# Altium PCB PiMX8MP_r0.3.PcbDoc (part 5 of 10)
Units mm, origin at the board's own origin, x right, y up, seen from the top; angles counter-clockwise.
Board outline 55 x 40 mm, 10 copper layers (Top Layer, Layer 1, Layer 2, Layer 3, Layer 4, Layer 5, Layer 6, Layer 7, Layer 8, Bottom Layer), stack 1.472 mm thick; 545 components, 477 nets, 2606 pads, 2278 vias.
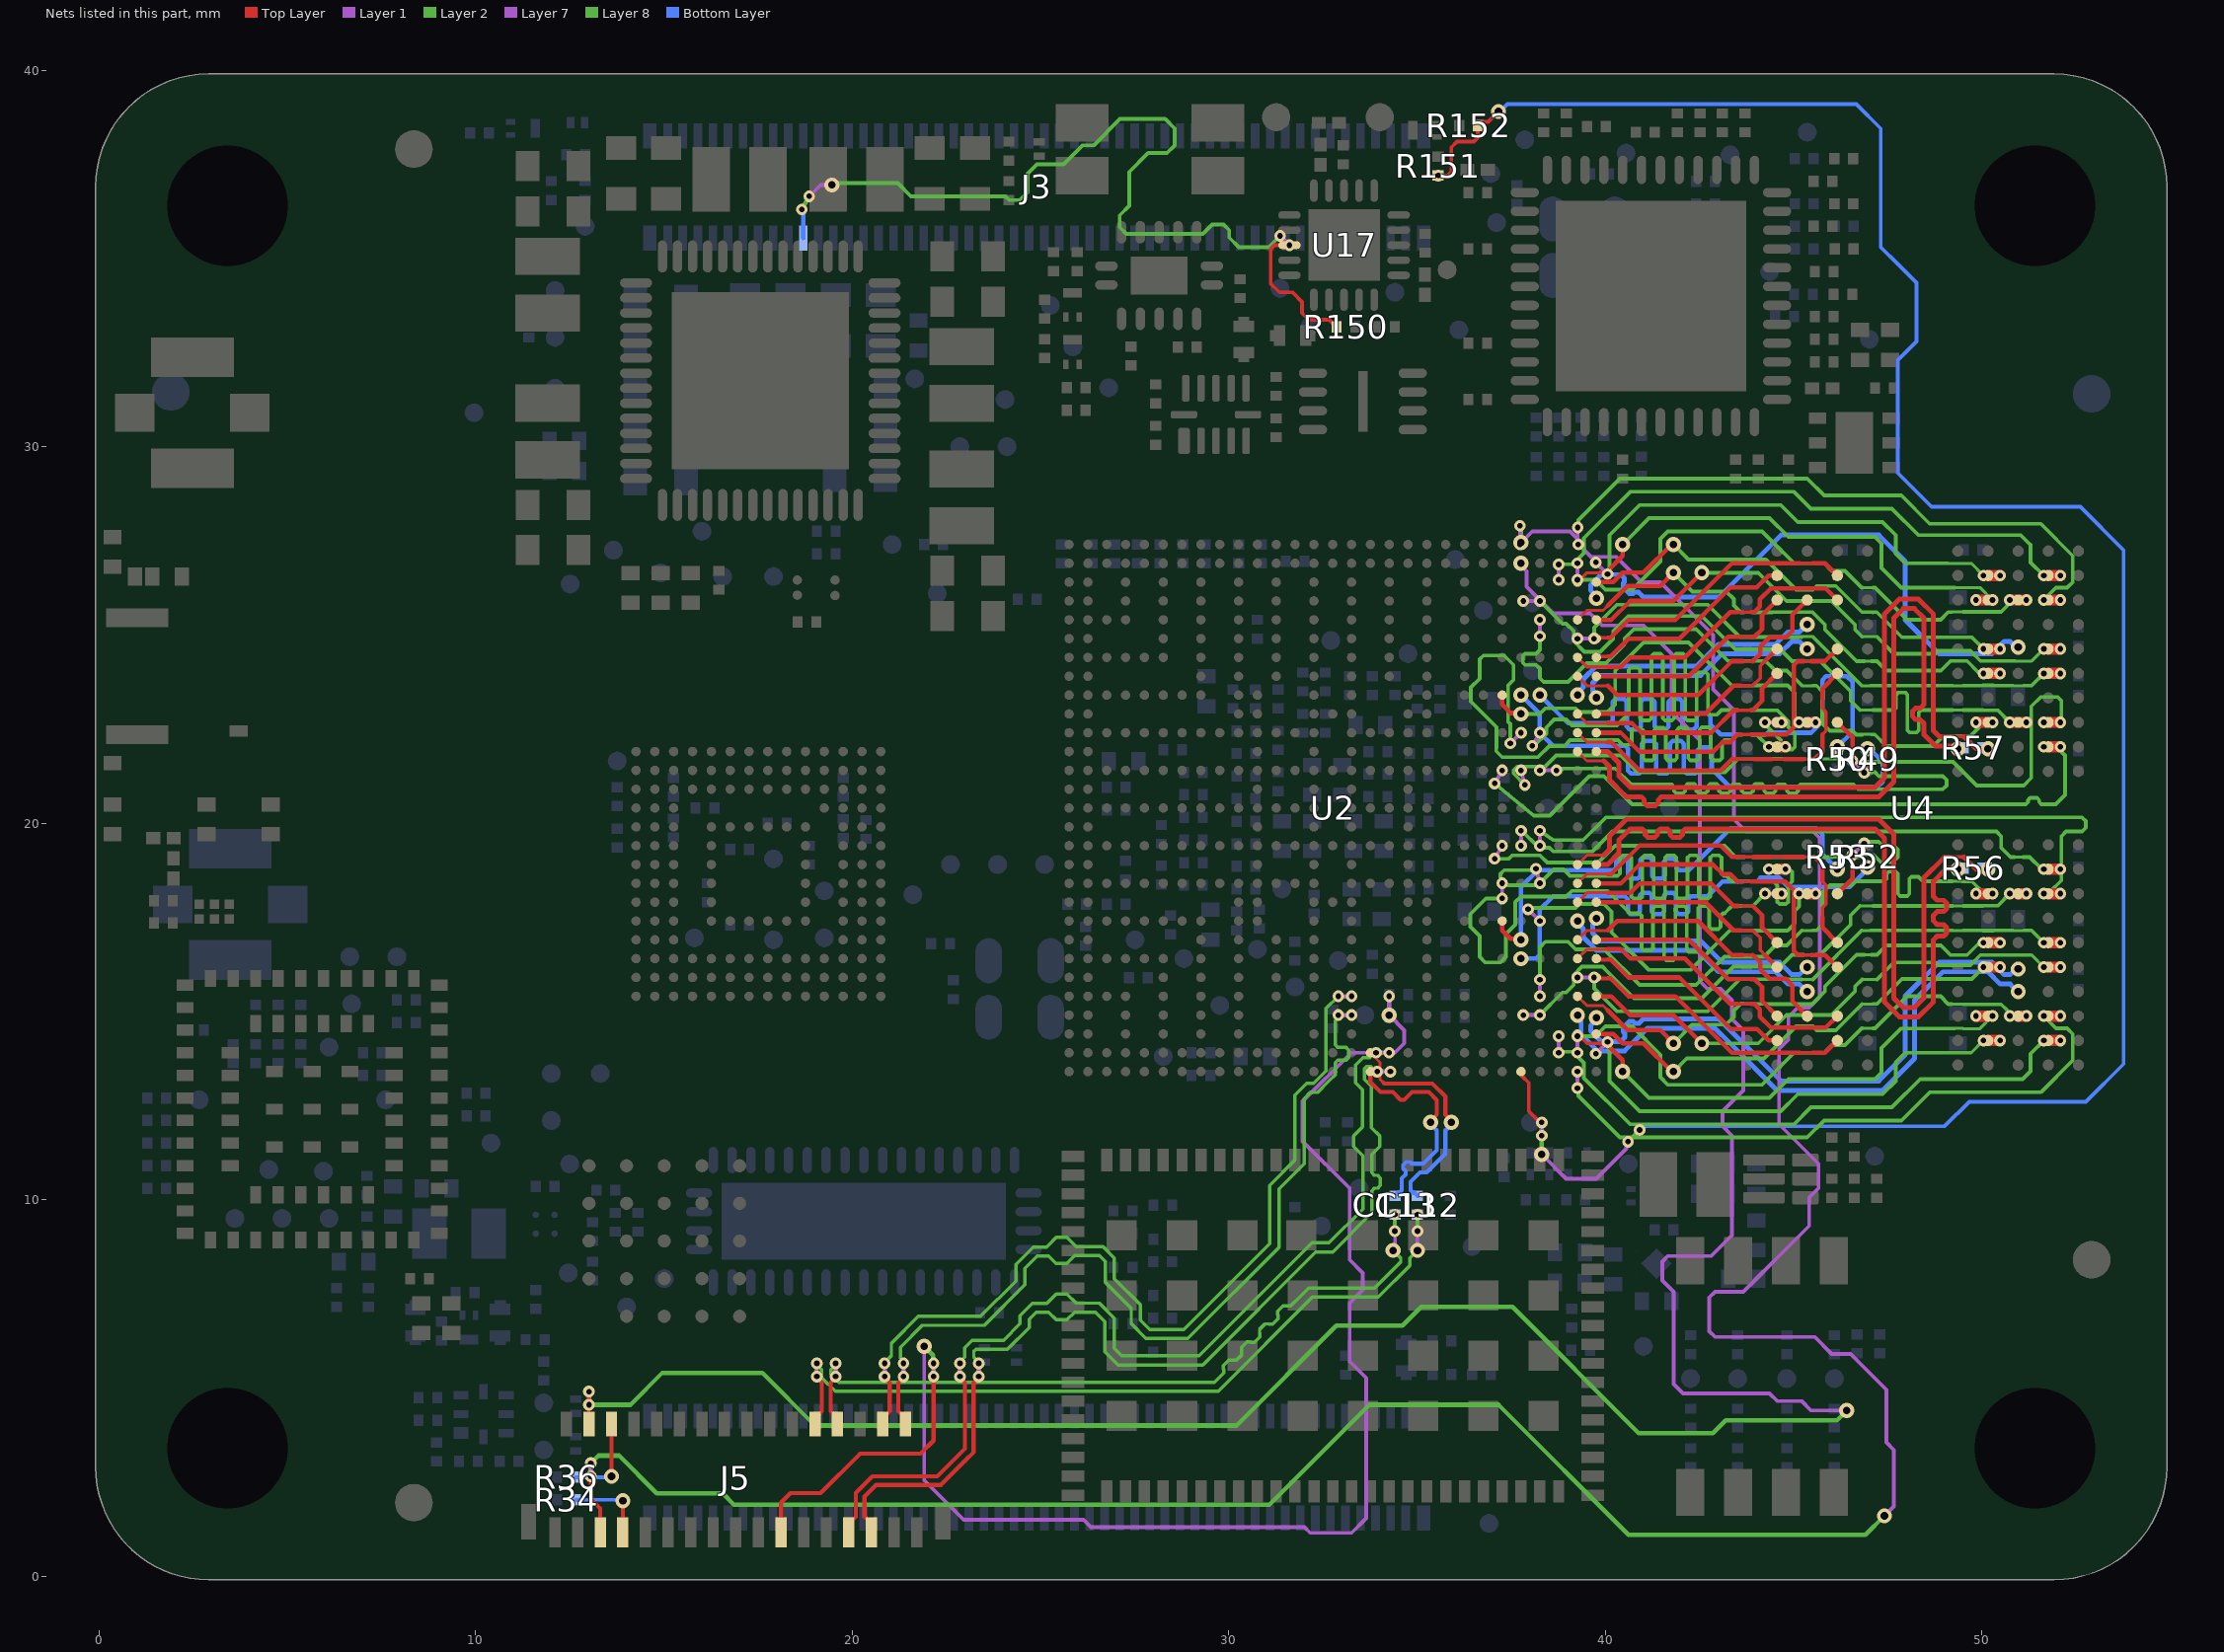
[diagram p13: the nets of this part, all layers, seen from the top]

## Via types
v1: diameter 0.4, hole 0.2, Top Layer to Bottom Layer, tented both sides, 946 vias
v2: diameter 0.31, hole 0.15, Top Layer to Layer 1, tented both sides, 321 vias
v3: diameter 0.31, hole 0.15, Layer 8 to Bottom Layer, tented both sides, 315 vias
v4: diameter 0.31, hole 0.15, Layer 1 to Layer 2, tented both sides, 257 vias
v5: diameter 0.31, hole 0.15, Layer 7 to Layer 8, tented both sides, 198 vias
v6: diameter 0.4, hole 0.2, Layer 2 to Layer 7, tented both sides, 169 vias
v7: diameter 0.31, hole 0.15, Top Layer to Layer 1, tented top, 72 vias

## Nets (pads, with @x,y where several pads share a name; then routed paths per layer and width w, separated by ;. In a path a pad name is that pad's centre, name@x,y a point inside that pad or via, vN(x,y) a via of type N, cw(c..) or ccw(c..) an arc to the next point about the centre after c; other vN are vias at no path point) (continued)
CON_SDA0: J3.82 R150.1 U17.3 | length 25.2
  Top Layer w0.1: v2(31.612,35.354) 31.212,35.354 31.112,35.254 31.112,34.338 31.35,34.1 31.7,34.1 31.95,33.85 31.95,33.55 32.125,33.375 32.667,33.375 32.762,33.279 32.777,33.279 32.862,33.194 R150.1@32.862,33.179
  Layer 1 w0.12: v4(31.365,35.602) v2(31.612,35.354)
  Layer 2 w0.1: v6(19.462,36.954) 19.512,37.004 21.212,37.004 21.562,36.654 24.067,36.654 24.167,36.554 24.457,36.554 24.662,36.759 24.662,37.254 24.912,37.504 25.612,37.504 26.112,38.004 26.412,38.004 27.112,38.704 28.312,38.704 28.562,38.454 28.562,38.004 28.362,37.804 27.862,37.804 27.357,37.299 27.357,36.778 27.362,36.773 27.362,36.404 27.105,36.147 27.105,35.831 27.283,35.652 27.536,35.652 27.539,35.654 29.312,35.654 29.562,35.904 29.862,35.904 30.012,35.754 30.012,35.554 30.267,35.299 31.062,35.299 v4(31.365,35.602)
  Layer 7 w0.1: v5(18.862,36.654) 19.162,36.954 v6(19.462,36.954)
  Layer 8 w0.12: v3(18.662,36.304) v5(18.862,36.654)
  Bottom Layer w0.12: v3(18.662,36.304) 18.662,36.253 18.702,36.213 J3.82@18.702,35.544
CPU_ACIVITY_LED: R151.1 R152.1 U2.A5 | length 63.1
  Top Layer w0.1: v2(35.562,37.204) 35.812,37.204 35.912,37.304 35.912,37.954 36.062,38.104 36.512,38.104 36.612,38.204 36.612,38.524 R152.1@36.617,38.529 36.617,38.544 36.702,38.629 36.887,38.629 v1(37.162,38.904) ; U2.A5@37.762,13.404 37.791,13.376 37.791,13.281 37.967,13.104 37.967,12.349 38.262,12.054 v2(38.312,12.054)
  Layer 1 w0.12: v4(38.312,11.704) v2@38.312,11.954
  Layer 2 w0.12: v6(38.312,11.204) v4(38.312,11.704)
  Layer 7 w0.1: v6(38.312,11.204) 38.962,10.554 39.762,10.554 40.561,11.353 40.561,11.503 v5(40.601,11.543)
  Layer 8 w0.1: v5(40.601,11.543) v3(40.912,11.854)
  Bottom Layer w0.1: v1(37.162,38.904) 37.201,38.904 37.396,39.099 46.667,39.099 47.312,38.454 47.312,35.304 47.762,34.854 48.262,34.354 48.262,32.799 47.762,32.299 47.762,29.304 48.662,28.404 52.612,28.404 53.762,27.254 53.762,13.604 52.762,12.604 49.662,12.604 49.012,11.954 41.069,11.954 40.969,11.854 v3(40.912,11.854)
DBG_CON_USB_C_TX_N: C112.1 U2.B13 | length 6.1
  Top Layer w0.08: U2.B13@33.762,13.904 34.017,13.649 34.017,13.199 34.112,13.104
  Top Layer w0.11: 34.112,13.104 34.127,13.089 35.407,13.089 35.753,12.744 35.753,12.264 35.913,12.104 v1(35.913,12.054)
  Bottom Layer w0.11: C112.1@35.012,10.104 34.932,10.184 34.892,10.184 34.827,10.249 34.827,10.475 35.077,10.724 35.257,10.724 35.753,11.22 35.753,11.845 35.913,12.005 v1(35.913,12.054)
DBG_CON_USB_C_TX_P: C113.1 U2.A13 | length 6
  Top Layer w0.11: U2.A13@33.762,13.404 33.762,13.129 34.032,12.859 34.357,12.859 34.562,12.654 34.662,12.654 34.867,12.859 35.312,12.859 35.523,12.648 35.523,12.264 35.363,12.104 v1(35.363,12.054)
  Bottom Layer w0.11: C113.1@34.412,10.104 34.492,10.184 34.533,10.184 34.597,10.249 34.597,10.57 34.697,10.67 34.697,10.77 34.633,10.834 34.633,10.925 34.712,11.004 34.812,11.004 34.862,10.954 35.162,10.954 35.523,11.315 35.523,11.845 35.363,12.005 v1(35.363,12.054)
DBG_CON_USB_D_N: J5.4 U2.E14 | length 24.1
  Top Layer w0.11: J5.4@20.812,4.046 20.812,4.221 20.907,4.316 20.933,4.316 20.997,4.38 20.997,5.14 20.862,5.275 v2(20.862,5.304)
  Layer 1 w0.12: v2(20.862,5.304) v4(20.862,5.654) ; v4(32.912,15.404) v2(33.262,15.404)
  Layer 2 w0.09: v4(20.862,5.654) 20.862,5.673 21.043,5.854 21.043,6.186 21.762,6.904 23.412,6.904 24.348,7.84 24.348,8.278 24.813,8.742 25.164,8.742 25.217,8.795 25.217,8.797 25.419,8.999 25.705,8.999 25.95,8.754 26.665,8.754 26.962,8.457 26.962,7.904 27.652,7.214 27.652,6.804 27.902,6.554 28.812,6.554 31.093,8.835 31.093,10.385 31.762,11.054 31.762,12.783 32.069,13.089 32.258,13.089 32.587,13.419 32.587,15.079 v4(32.912,15.404)
DBG_CON_USB_D_P: J5.2 U2.D14 | length 24
  Top Layer w0.11: v2(21.362,5.304) 21.362,5.275 21.227,5.14 21.227,4.38 21.292,4.316 21.317,4.316 21.412,4.221 J5.2@21.412,4.046
  Layer 1 w0.12: v2(21.362,5.304) v4(21.362,5.654) ; v4(32.912,14.904) v2(33.262,14.904)
  Layer 2 w0.09: v4(21.362,5.654) 21.362,5.714 21.283,5.793 21.283,6.086 21.862,6.664 23.512,6.664 24.588,7.741 24.588,8.178 24.912,8.502 25.217,8.502 25.41,8.309 25.705,8.309 25.91,8.514 26.565,8.514 26.722,8.357 26.722,7.805 27.412,7.115 27.412,6.704 27.802,6.314 28.912,6.314 31.333,8.735 31.333,10.285 32.002,10.955 32.002,12.684 32.168,12.849 32.357,12.849 32.662,13.154 32.827,13.319 32.827,13.636 32.895,13.704 33.121,13.704 33.189,13.772 33.189,13.976 33.121,14.044 32.895,14.044 32.827,14.112 32.827,14.454 32.827,14.76 32.912,14.845 v4(32.912,14.904)
DBG_CON_USB_RX_N: J5.7 U2.B12 | length 26.4
  Top Layer w0.11: J5.7@19.912,1.171 19.912,1.421 20.007,1.516 20.033,1.516 20.097,1.58 20.097,2.215 20.537,2.654 22.262,2.654 22.77,3.162 22.997,3.389 22.997,5.14 22.862,5.275 v2(22.862,5.304)
  Layer 1 w0.12: v2(22.862,5.304) v4(22.862,5.654) ; v4(33.912,13.904) v2@34.162,13.904
  Layer 2 w0.09: v4(22.862,5.654) 22.862,5.687 22.992,5.817 22.992,6.072 23.186,6.265 24.023,6.265 24.462,6.704 24.462,6.925 24.789,7.251 25.171,7.251 25.419,7.499 25.705,7.499 25.95,7.254 26.562,7.254 26.957,6.859 26.957,6.06 27.162,5.854 29.212,5.854 32.212,8.854 32.662,8.854 33.562,9.754 33.562,11.167 33.317,11.412 33.317,11.697 33.552,11.932 33.552,12.918 33.369,13.1 33.369,13.581 33.563,13.774 33.749,13.774 33.879,13.904 v4(33.912,13.904)
  other v2: 34.262,13.904
DBG_CON_USB_RX_P: J5.5 U2.A12 | length 26.3
  Top Layer w0.11: J5.5@20.512,1.171 20.512,1.421 20.417,1.516 20.392,1.516 20.327,1.58 20.327,2.119 20.632,2.424 22.357,2.424 23,3.067 23.227,3.294 23.227,5.14 23.362,5.275 v2(23.362,5.304)
  Layer 1 w0.12: v2(23.362,5.304) v4(23.362,5.654) ; v4(33.942,13.404) v2@34.192,13.404
  Layer 2 w0.09: v4(23.362,5.654) 23.362,5.687 23.232,5.817 23.232,5.972 23.285,6.025 24.122,6.025 24.702,6.605 24.702,6.825 24.888,7.011 25.217,7.011 25.419,6.809 25.705,6.809 25.91,7.014 26.462,7.014 26.717,6.76 26.717,5.961 27.063,5.614 29.312,5.614 32.312,8.614 32.762,8.614 33.802,9.655 33.802,9.855 33.802,10.24 33.87,10.308 33.956,10.308 34.024,10.376 34.024,10.58 33.956,10.648 33.87,10.648 33.802,10.716 33.802,10.954 33.802,11.207 34.007,11.412 34.007,11.697 33.792,11.912 33.792,13.017 33.609,13.2 33.609,13.482 33.662,13.534 33.779,13.534 33.909,13.404 v4(33.942,13.404)
  other v2: 34.292,13.404
DBG_CON_USB_TX_N: C112.2 J5.10 | length 20.7
  Top Layer w0.11: J5.10@19.012,4.046 19.012,4.221 19.107,4.316 19.133,4.316 19.197,4.38 19.197,5.14 19.062,5.275 v2(19.062,5.304)
  Layer 1 w0.12: v2(19.062,5.304) v4(19.062,5.654)
  Layer 2 w0.09: v4(19.062,5.654) 19.062,5.622 19.192,5.492 19.192,5.275 19.553,4.914 29.722,4.914 32.222,7.414 33.972,7.414 34.807,8.249 34.807,8.449 v6(35.012,8.654)
  Layer 7 w0.09: v6@35.012,8.724 v5(35.012,9.164)
  Layer 8 w0.1: v5(35.012,9.164) v3(35.012,9.604)
DBG_CON_USB_TX_P: C113.2 J5.8 | length 20.5
  Top Layer w0.11: v2(19.562,5.304) 19.562,5.275 19.427,5.14 19.427,4.38 19.492,4.316 19.517,4.316 19.612,4.221 J5.8@19.612,4.046
  Layer 1 w0.12: v2(19.562,5.304) v4(19.562,5.654)
  Layer 2 w0.09: v4(19.562,5.654) 19.562,5.622 19.432,5.492 19.432,5.374 19.652,5.154 29.623,5.154 29.656,5.188 29.866,5.398 29.866,5.494 29.858,5.502 29.858,5.598 30.002,5.742 30.099,5.742 30.107,5.734 30.203,5.734 30.347,5.879 30.347,5.975 30.339,5.983 30.339,6.079 30.483,6.223 30.579,6.223 30.587,6.215 30.684,6.215 30.828,6.36 30.828,6.456 30.82,6.464 30.82,6.56 30.964,6.704 31.06,6.704 31.068,6.696 31.164,6.696 31.309,6.84 31.309,6.937 31.301,6.944 31.301,7.041 31.445,7.185 31.541,7.185 31.549,7.177 31.645,7.177 31.918,7.449 32.123,7.654 33.873,7.654 34.567,8.349 34.567,8.449 v6(34.362,8.654)
  Layer 7 w0.09: v6@34.412,8.724 v5(34.412,9.164)
  Layer 8 w0.1: v5(34.412,9.164) v3(34.412,9.604)
DBG_CON_USB_VBUS: J5.13 U2.D12 | length 41.4
  Top Layer w0.11: J5.13@18.112,1.171 18.112,1.954 18.362,2.204 19.162,2.204 20.212,3.254 21.812,3.254 22.162,3.604 v2@22.162,5.204
  Layer 1 w0.12: v2(22.162,5.304) v4(22.162,5.654) ; v2(34.262,14.904) v4(34.262,15.404)
  Layer 2 w0.12: v6(21.912,6.104) 22.145,5.871 22.145,5.671 v4(22.162,5.654) ; v2(34.262,14.904) v4(34.262,15.404)
  Layer 7 w0.1: v6(21.912,6.104) 21.912,2.554 22.962,1.504 26.146,1.504 26.346,1.304 32.012,1.304 32.162,1.154 33.262,1.154 33.65,1.542 33.65,5.267 33.212,5.704 33.212,7.254 33.562,7.604 33.562,8.054 33.212,8.404 33.212,10.304 31.962,11.554 31.962,12.614 33.253,13.904 34.412,13.904 34.663,14.155 34.663,14.504 v2(34.262,14.904)
  other v6: 34.262,14.904
DBG_UART_A53_RX: J5.27 R34.2 | length 2.1
  Top Layer w0.1: J5.27@13.912,1.171 v1(13.912,2.004)
  Bottom Layer w0.1: R34.2@12.662,2.029 13.887,2.029 v1(13.912,2.004)
DBG_UART_A53_TX: J5.28 R36.2 | length 2.4
  Top Layer w0.1: v1(13.612,2.654) J5.28@13.612,4.046
  Bottom Layer w0.1: R36.2@12.662,2.629 13.587,2.629 v1(13.612,2.654)
DBG_UART_M7_RX: J5.29 U2.AJ5 | length 79.3
  Top Layer w0.1: v2(13.062,2.654) 13.062,2.054 13.312,1.804 J5.29@13.312,1.171
  Layer 1 w0.1: v2(37.732,27.404) v4(37.732,27.904)
  Layer 1 w0.12: v2(13.062,2.654) v4(13.062,3.004)
  Layer 2 w0.1: v4@37.712,27.904 37.712,27.848 37.762,27.798 v6(37.762,27.454)
  Layer 2 w0.12: v4(13.062,3.004) 13.262,3.204 13.812,3.204 14.812,2.204 16.562,2.204 16.862,1.904 31.082,1.904 33.732,4.554 37.164,4.554 40.614,1.104 46.912,1.104 v6(47.412,1.604)
  Layer 7 w0.1: v6(37.762,27.454) 38.062,27.754 39.062,27.754 39.432,27.384 39.432,27.268 39.626,27.074 40.292,27.074 40.962,26.404 41.462,26.404 42.862,25.004 42.862,23.554 43.412,23.004 43.412,20.104 43.737,19.779 45.517,19.779 45.692,19.604 45.692,15.393 45.404,15.104 45.112,15.104 44.862,14.854 44.862,14.254 44.612,14.004 44.612,12.004 45.662,10.954 45.662,10.304 45.412,10.054 45.412,9.304 43.662,7.554 42.912,7.554 42.762,7.404 42.762,6.504 42.912,6.354 45.562,6.354 46.012,5.904 46.512,5.904 47.462,4.954 47.462,3.554 47.662,3.354 47.662,1.854 v6(47.412,1.604)
DBG_UART_M7_TX: J5.30 U2.AH5 | length 70.9
  Top Layer w0.1: J5.30@13.012,4.046 v2(13.012,4.904)
  Layer 1 w0.12: v4(13.012,4.554) v2(13.012,4.904)
  Layer 2 w0.12: v4(13.012,4.554) 14.112,4.554 14.962,5.404 17.612,5.404 19.012,4.004 30.212,4.004 32.862,6.654 34.612,6.654 35.112,7.154 37.534,7.154 40.884,3.804 42.862,3.804 43.202,4.144 46.152,4.144 v6(46.412,4.404)
  Layer 7 w0.1: v1(37.762,26.904) 37.762,26.846 37.912,26.696 37.912,26.288 38.626,25.574 39.592,25.574 39.912,25.254 41.012,25.254 41.762,24.504 41.762,22.954 42.512,22.204 42.512,15.804 42.712,15.604 43.062,15.604 43.362,15.304 43.362,14.804 43.662,14.504 43.662,12.904 43.112,12.354 43.112,11.954 43.362,11.704 43.362,9.054 42.812,8.504 41.662,8.504 41.512,8.354 41.512,7.854 41.812,7.554 41.812,5.104 42.062,4.854 44.362,4.854 44.562,4.654 45.212,4.654 45.462,4.404 v6(46.412,4.404)
DRAM_A_CA0: U2.L6 U4.R2 | length 20.7
  Top Layer w0.3: U4.R2@44.562,18.129 v2(44.682,18.129) ; v2(44.682,18.129) 44.682,18.134 44.687,18.129 v2(44.682,18.129)
  Layer 1 w0.1: v4(37.262,18.004) v2(37.262,18.404) ; v4(44.242,18.129) v2(44.682,18.129)
  Layer 2 w0.08: 43.621,17.804 43.912,17.804
  Layer 2 w0.1: v4(37.262,18.004) 36.829,18.004 36.412,17.588 36.412,17.254 36.662,17.004 36.662,16.454 36.812,16.304 37.212,16.304 37.362,16.454 37.362,17.054 37.612,17.304 37.612,17.904 37.762,18.054 38.962,18.054 39.112,18.204 40.062,18.204 40.403,17.863 40.662,17.604 40.902,17.604 40.962,17.544 40.962,16.682 41.022,16.622 41.202,16.622 41.262,16.682 41.262,17.737 41.322,17.797 41.502,17.797 41.562,17.737 41.562,16.42 41.622,16.36 41.802,16.36 41.862,16.42 41.862,17.737 41.922,17.797 42.102,17.797 42.162,17.737 42.162,16.647 42.222,16.587 42.402,16.587 42.462,16.647 42.462,17.737 42.522,17.797 42.702,17.797 42.762,17.737 42.762,17.247 42.822,17.187 43.002,17.187 43.062,17.247 43.062,17.544 43.122,17.604 43.162,17.604 43.172,17.614 43.362,17.804 43.621,17.804 ; 43.912,17.804 43.917,17.804 v4(44.242,18.129)
DRAM_A_CA1: U2.L4 U4.P2 | length 21.8
  Top Layer w0.3: U4.P2@44.562,18.779 v2(44.782,18.779)
  Layer 1 w0.1: v4(38.159,18.791) v2(38.262,18.404) ; v4(44.342,18.779) v2(44.782,18.779)
  Layer 2 w0.08: 43.512,18.454 43.912,18.454
  Layer 2 w0.1: v4(38.159,18.791) 38.122,18.754 37.312,18.754 37.212,18.654 37.212,18.554 37.412,18.354 38.212,18.354 38.632,18.774 38.892,18.774 39.062,18.604 40.106,18.604 40.326,18.604 40.386,18.664 40.386,19.087 40.446,19.147 40.626,19.147 40.686,19.087 40.686,18.057 40.746,17.997 40.926,17.997 40.986,18.057 40.986,19.087 41.046,19.147 41.226,19.147 41.286,19.087 41.286,18.057 41.346,17.997 41.526,17.997 41.586,18.057 41.586,19.087 41.646,19.147 41.826,19.147 41.886,19.087 41.886,18.057 41.946,17.997 42.126,17.997 42.186,18.057 42.186,19.087 42.246,19.147 42.426,19.147 42.486,19.087 42.486,18.057 42.546,17.997 42.726,17.997 42.786,18.057 42.786,19.087 42.846,19.147 43.026,19.147 43.086,19.087 43.086,18.664 43.146,18.604 43.212,18.604 43.362,18.454 43.496,18.454 43.512,18.454 ; 43.912,18.454 44.462,18.454 44.566,18.35 44.566,17.913 44.625,17.854 44.799,17.854 44.857,17.913 44.857,18.349 44.962,18.454 44.962,18.704 44.887,18.779 v4(44.342,18.779)
DRAM_A_CA2: U2.E4 U4.R9 | length 17.7
  Top Layer w0.3: v2(49.842,18.129) U4.R9@50.162,18.129
  Layer 1 w0.1: v2(38.262,15.404) v4(38.262,15.844) ; v2(49.842,18.129) v4(50.282,18.129)
  Layer 2 w0.08: 45.221,17.154 45.512,17.154 ; 49.212,18.459 49.474,18.459 49.479,18.454
  Layer 2 w0.1: v4(38.262,15.844) 38.262,16.704 38.412,16.854 39.012,16.854 39.212,16.654 39.962,16.654 40.912,15.704 42.412,15.704 43.162,16.454 44.212,16.454 44.512,16.754 44.821,16.754 45.221,17.154 ; 45.512,17.154 45.608,17.154 45.762,17.309 45.762,18.154 45.962,18.354 46.537,18.354 46.642,18.459 47.362,18.459 47.412,18.459 47.472,18.519 47.472,18.653 47.532,18.713 47.712,18.713 47.772,18.653 47.772,18.124 47.832,18.064 48.012,18.064 48.072,18.124 48.072,18.521 48.132,18.581 48.312,18.581 48.372,18.521 48.372,18.519 48.432,18.459 48.613,18.459 49.212,18.459 ; 49.479,18.454 49.737,18.454 50.062,18.129 v4(50.282,18.129)
DRAM_A_CA3: U2.D4 U4.R10 | length 16.4
  Top Layer w0.3: U4.R10@50.962,18.129 v2(51.182,18.129)
  Layer 1 w0.1: v4(37.822,14.904) v2(38.262,14.904) ; v4(50.742,18.129) v2(51.182,18.129)
  Layer 2 w0.08: 45.262,16.504 45.587,16.504 ; 46.762,17.804 47.112,17.804 ; 49.221,17.804 49.504,17.804
  Layer 2 w0.1: v4(37.822,14.904) v2(38.262,14.904) 38.862,15.504 38.962,15.504 39.162,15.704 39.162,15.974 39.377,16.189 39.927,16.189 40.062,16.054 40.762,15.354 42.562,15.354 43.397,16.189 43.512,16.189 44.647,16.189 44.962,16.504 45.262,16.504 ; 45.587,16.504 45.712,16.504 46.512,17.304 46.512,17.554 46.762,17.804 ; 47.112,17.804 49.221,17.804 ; 49.504,17.804 50.021,17.804 50.026,17.809 50.422,17.809 v4(50.742,18.129)
DRAM_A_CA4: U2.N4 U4.R11 | length 18.7
  Top Layer w0.3: U4.R11@51.762,18.129 v2(52.082,18.129)
  Layer 1 w0.1: v2(38.262,19.404) v4(38.262,19.804) ; v4(51.642,18.129) v2(52.082,18.129)
  Layer 2 w0.1: v4(38.262,19.804) 38.617,19.554 39.412,19.554 40.012,20.154 52.662,20.154 52.762,20.054 52.762,19.879 52.662,19.779 52.237,19.779 52.112,19.654 52.112,18.479 51.802,18.17 51.682,18.17 v4(51.642,18.129)
DRAM_A_CA5: U2.N5 U4.P11 | length 16.1
  Top Layer w0.3: U4.P11@51.762,18.779 v2(52.082,18.779)
  Layer 1 w0.1: v2(37.762,19.404) v4(37.762,19.804) ; v4(51.642,18.779) v2(52.082,18.779)
  Layer 2 w0.08: 50.862,19.099 51.095,19.099
  Layer 2 w0.1: v4(37.762,19.804) 38.252,19.354 38.512,19.354 38.612,19.254 39.662,19.254 40.187,19.779 50.387,19.779 50.512,19.654 50.512,19.349 50.762,19.099 50.862,19.099 ; v4@37.762,19.844 v4@37.782,19.824 ; 51.095,19.099 51.268,19.099 51.588,18.779 v4(51.642,18.779)
DRAM_A_CKE0: R53.2 U2.J6 U4.P4 | length 14.4
  Top Layer w0.12: U2.J6@37.262,17.404 37.262,17.154 37.489,16.928 37.739,16.928 v1(37.762,16.904)
  Bottom Layer w0.12: v1(37.762,16.904) 37.762,18.304 38.212,18.754 40.157,18.754 40.217,18.754 40.287,18.825 40.287,19.027 40.351,19.091 40.543,19.091 40.607,19.027 40.607,18.599 40.671,18.535 40.863,18.535 40.927,18.599 40.927,19.027 40.991,19.091 41.183,19.091 41.247,19.027 41.247,18.599 41.311,18.535 41.503,18.535 41.567,18.599 41.567,18.987 41.631,19.051 41.823,19.051 41.887,18.987 41.887,18.825 41.957,18.754 42.098,18.754 42.212,18.754 43.312,19.854 45.612,19.854 45.762,19.704 45.762,19.179 46.012,18.929 46.072,18.929 46.162,18.839 v1(46.162,18.779)
DRAM_A_CKE1: R52.2 U2.G5 U4.P5 | length 13.9
  Bottom Layer w0.08: 43.662,18.454 44.012,18.454 44.112,18.554
  Bottom Layer w0.12: v1(37.762,16.404) 38.162,16.404 38.262,16.504 38.262,17.704 38.612,18.054 40.148,18.054 40.528,18.054 40.598,17.984 40.598,17.649 40.662,17.585 40.854,17.585 40.918,17.649 40.918,18.087 40.982,18.151 41.174,18.151 41.238,18.087 41.238,17.649 41.302,17.585 41.494,17.585 41.558,17.649 41.558,18.087 41.622,18.151 41.814,18.151 41.878,18.087 41.878,17.649 41.942,17.585 42.134,17.585 42.198,17.649 42.198,17.984 42.268,18.054 42.712,18.054 42.767,18.109 43.112,18.454 43.662,18.454 ; 44.112,18.554 44.612,18.554 44.862,18.304 46.487,18.304 46.872,18.689 46.872,18.779 46.91,18.817 R52.2@46.925,18.817 ; R52.2@46.962,18.779 R52.2@46.962,18.854
  other v1: 46.962,18.829
DRAM_A_CLK_N: R56.2 U2.M2 U4.P9 | length 19.9
  Top Layer w0.08: U2.M2@39.262,18.904 39.507,19.149 39.954,19.149
  Top Layer w0.09: 49.112,19.104 49.511,19.104
  Top Layer w0.13: 39.954,19.149 40.112,19.308 40.112,19.658 40.559,20.104 47.266,20.104 47.662,19.708 47.662,15.354 47.912,15.104 48.209,15.104 48.462,15.358 48.462,18.558 49.004,19.099 49.112,19.099 ; 49.511,19.099 49.53,19.099 49.85,18.779 v1(50.162,18.779)
DRAM_A_CLK_P: R56.1 U2.M1 U4.P8 | length 19.9
  Top Layer w0.09: U4.P8@49.301,18.718 U4.P8@49.301,18.742
  Top Layer w0.13: U2.M1@39.762,18.904 40.062,18.904 40.362,19.204 40.362,19.504 40.362,19.554 40.588,19.78 40.662,19.854 40.983,19.854 41.059,19.778 41.059,19.695 41.125,19.629 41.323,19.629 41.389,19.695 41.389,19.788 41.455,19.854 41.653,19.854 41.719,19.788 41.719,19.695 41.785,19.629 41.983,19.629 42.049,19.695 42.049,19.778 42.125,19.854 44.073,19.854 47.162,19.854 47.412,19.604 47.412,15.251 47.635,15.028 47.809,14.854 48.312,14.854 48.712,15.254 48.712,16.904 48.812,17.004 48.986,17.004 49.062,17.081 49.062,17.228 48.986,17.304 48.812,17.304 48.712,17.404 48.712,17.554 48.812,17.654 48.986,17.654 49.062,17.731 49.062,17.878 48.986,17.954 48.812,17.954 48.712,18.054 48.712,18.454 49.063,18.806 49.336,18.806 v1(49.362,18.779)
DRAM_A_CS0: U2.N6 U4.R4 | length 14.5
  Top Layer w0.12: U4.R4@46.162,18.129 46.562,18.529 v2(46.562,19.154)
  Layer 1 w0.1: v4(37.062,19.058) v2(37.262,19.404) ; v2(46.562,19.154) v4(46.873,19.466)
  Layer 2 w0.08: 43.687,19.104 43.912,19.104 ; 45.273,19.104 45.504,19.104 ; 46.021,19.104 46.304,19.104
  Layer 2 w0.1: v4(37.062,19.058) 37.438,19.058 37.529,19.149 38.267,19.149 38.462,18.954 39.812,18.954 40.062,19.204 40.262,19.404 43.162,19.404 43.462,19.104 43.687,19.104 ; 43.912,19.104 44.421,19.104 44.426,19.099 44.699,19.099 44.704,19.104 45.273,19.104 ; 45.504,19.104 46.021,19.104 ; 46.304,19.104 46.771,19.104 46.826,19.159 47.127,19.159 47.312,18.974 47.312,18.963 47.621,18.963 47.762,19.104 47.762,19.304 47.662,19.404 47.362,19.404 47.262,19.504 46.912,19.504 v4(46.873,19.466)
DRAM_A_CS1: U2.J4 U4.R3 | length 10.6
  Top Layer w0.3: U4.R3@45.362,18.129 v2(45.582,18.129)
  Layer 1 w0.1: v4(37.951,17.716) v2(38.262,17.404) ; v4(45.142,18.129) v2(45.582,18.129)
  Layer 2 w0.08: 43.512,17.154 43.612,17.154 43.912,17.154
  Layer 2 w0.1: v4(37.951,17.716) 37.99,17.754 39.212,17.754 39.312,17.854 39.962,17.854 40.162,17.654 40.162,17.104 41.162,16.104 42.262,16.104 43.312,17.154 43.512,17.154 ; 43.912,17.154 43.917,17.149 44.839,17.149 45.032,17.343 45.032,17.674 45.142,17.784 v4(45.142,18.129)
DRAM_A_DATA0: U2.B3 U4.AA11 | length 16.6
  Top Layer w0.3: U4.AA11@51.762,14.229 v2(52.082,14.229)
  Layer 1 w0.1: v2(38.762,13.904) v4(38.762,14.344) ; v4(51.642,14.229) v2(52.082,14.229)
  Layer 2 w0.1: v4(38.762,14.344) 38.762,14.054 38.887,13.929 39.137,13.929 39.432,13.634 39.432,13.234 40.662,12.004 45.012,12.004 45.462,12.454 47.612,12.454 48.362,13.204 51.082,13.204 51.292,13.414 51.292,13.879 v4(51.642,14.229)
DRAM_A_DATA1: U2.A2 U4.Y11 | length 17.5
  Top Layer w0.3: U4.Y11@51.762,14.879 v2(52.082,14.879)
  Layer 1 w0.1: v4(39.262,12.964) v2(39.262,13.404) ; v4(51.642,14.879) v2(52.082,14.879)
  Layer 2 w0.1: v4(39.262,12.964) 39.287,12.94 39.287,12.758 40.39,11.654 45.362,11.654 45.812,12.104 47.862,12.104 48.612,12.854 51.562,12.854 52.412,13.704 52.412,14.404 52.262,14.554 51.967,14.554 v4(51.642,14.879)
DRAM_A_DATA2: U2.E1 U4.V11 | length 14.4
  Top Layer w0.12: U2.E1@39.762,15.404 40.162,15.404 40.662,14.904 41.812,14.904 v1(42.562,14.154)
  Top Layer w0.3: U4.V11@51.762,16.179 v2(52.082,16.179)
  Layer 1 w0.1: v4(51.642,16.179) v2(52.082,16.179)
  Layer 2 w0.08: 46.821,15.854 47.212,15.854 ; 50.876,16.499 51.322,16.499 v4(51.642,16.179)
  Layer 2 w0.1: v1(42.562,14.154) 44.062,14.154 44.812,14.904 46.004,14.904 46.632,15.533 46.632,15.666 46.821,15.854 ; 47.212,15.854 47.662,16.304 48.762,16.304 48.837,16.229 49.689,16.229 49.959,16.499 50.876,16.499
DRAM_A_DATA3: U2.F2 U4.U11 | length 14.7
  Top Layer w0.3: U4.U11@51.762,16.829 v2(52.082,16.829)
  Layer 1 w0.1: v2(39.262,15.904) v4(39.702,15.904) ; v4(51.642,16.829) v2(52.082,16.829)
  Layer 2 w0.08: 45.212,15.854 45.512,15.854 ; 46.812,17.154 47.037,17.154 ; 49.221,17.154 49.512,17.154 ; 50.821,17.154 51.1,17.154
  Layer 2 w0.1: v4(39.702,15.904) 39.702,15.614 40.312,15.004 42.716,15.004 43.571,15.859 45.207,15.859 45.212,15.854 ; 45.512,15.854 46.812,17.154 ; 47.037,17.154 49.221,17.154 ; 49.512,17.154 50.021,17.154 50.026,17.149 50.299,17.149 50.304,17.154 50.821,17.154 ; 51.1,17.154 51.317,17.154 v4(51.642,16.829)
DRAM_A_DATA4: U2.E2 U4.U9 | length 13.6
  Top Layer w0.08: U2.E2@39.262,15.404 39.512,15.154 39.941,15.154 40.062,15.033
  Top Layer w0.12: 40.062,15.033 40.591,14.504 41.462,14.504 v1(41.812,14.154)
  Top Layer w0.3: U4.U9@50.162,16.829 v2(50.482,16.829)
  Layer 1 w0.1: v4(50.042,16.829) v2(50.482,16.829)
  Layer 2 w0.08: 43.682,15.204 43.912,15.204 ; 46.873,16.504 47.062,16.504
  Layer 2 w0.1: v1(41.812,14.154) 42.312,14.654 43.212,14.654 43.412,14.854 43.412,15.024 43.597,15.209 43.682,15.209 ; 43.912,15.204 44.421,15.204 44.426,15.199 45.499,15.199 45.832,15.533 45.832,15.666 46.671,16.504 46.873,16.504 ; 47.062,16.504 47.212,16.504 47.462,16.754 48.912,16.754 49.167,16.499 49.607,16.499 49.897,16.789 50.002,16.789 v4(50.042,16.829)
DRAM_A_DATA5: U2.C1 U4.V9 | length 12.7
  Top Layer w0.12: U2.C1@39.762,14.404 40.212,14.404 40.462,14.154 41.012,14.154 41.762,13.404 v1(41.812,13.404)
  Top Layer w0.3: U4.V9@50.162,16.179 v2(50.482,16.179)
  Layer 1 w0.1: v4(50.042,16.179) v2(50.482,16.179)
  Layer 2 w0.08: 46.816,15.2 47.104,15.2
  Layer 2 w0.1: v1(41.812,13.404) 42.162,13.754 44.212,13.754 45.062,14.604 45.512,14.604 45.612,14.504 46.121,14.504 46.816,15.2 ; 47.104,15.204 47.108,15.2 47.208,15.2 47.876,15.868 49.731,15.868 v4(50.042,16.179)
DRAM_A_DATA6: U2.C2 U4.Y9 | length 13.9
  Top Layer w0.08: U2.C2@39.262,14.404 39.512,14.154 39.862,14.154
  Top Layer w0.12: 39.862,14.154 40.012,14.154 40.462,13.704 v1(40.462,13.404)
  Top Layer w0.3: v2(49.842,14.879) U4.Y9@50.162,14.879
  Layer 1 w0.1: v2(49.842,14.879) v4(50.282,14.879)
  Layer 2 w0.08: 49.276,14.549 49.495,14.549 49.498,14.546 49.949,14.546 v4(50.282,14.879)
  Layer 2 w0.1: v1(40.462,13.404) 41.162,12.704 44.362,12.704 44.862,13.204 47.162,13.204 47.337,13.379 47.337,14.029 47.857,14.549 49.276,14.549
DRAM_A_DATA7: U2.B1 U4.AA9 | length 13.6
  Top Layer w0.3: U4.AA9@50.162,14.229 v2(50.482,14.229)
  Layer 1 w0.1: v2(39.748,13.879) v4(40.059,14.191) ; v4(50.042,14.229) v2(50.482,14.229)
  Layer 2 w0.08: 49.087,13.904 49.717,13.904 v4(50.042,14.229)
  Layer 2 w0.1: v4(40.059,14.191) 40.1,14.15 40.1,14.04 40.112,14.027 40.112,13.154 40.912,12.354 44.662,12.354 45.112,12.804 47.362,12.804 47.712,13.154 47.712,13.654 47.962,13.904 49.087,13.904
DRAM_A_DATA8: U2.G1 U4.AA2 | length 5.7
  Top Layer w0.1: U2.G1@39.762,16.404 39.787,16.38 40.062,16.38
  Top Layer w0.12: 40.062,16.38 40.137,16.38 40.612,15.904 41.962,15.904 43.327,14.539 44.027,14.539 44.336,14.23 U4.AA2@44.562,14.229
DRAM_A_DATA9: U2.H1 U4.Y2 | length 5.9
  Top Layer w0.09: 43.562,15.854 43.862,15.854
  Top Layer w0.12: U2.H1@39.762,16.904 42.212,16.904 43.262,15.854 43.562,15.854 ; 43.862,15.854 43.962,15.854 44.162,15.654 44.162,15.279 U4.Y2@44.562,14.879
DRAM_A_DATA10: U2.K1 U4.V2 | length 5.7
  Top Layer w0.09: 43.606,17.154 43.912,17.154 44.112,16.954 44.112,16.629 44.237,16.504
  Top Layer w0.12: U2.K1@39.762,17.904 42.662,17.904 43.412,17.154 43.606,17.154 ; 44.237,16.504 U4.V2@44.562,16.179
DRAM_A_DATA11: U2.K2 U4.U2 | length 6.4
  Top Layer w0.08: U2.K2@39.262,17.904 39.512,18.154 40.062,18.154
  Top Layer w0.09: 43.512,17.804 43.918,17.804
  Top Layer w0.12: 40.062,18.154 40.662,18.154 40.912,18.404 42.812,18.404 43.412,17.804 43.512,17.804 ; 43.918,17.804 44.162,17.56 44.162,17.229 U4.U2@44.562,16.829
DRAM_A_DATA12: U2.L2 U4.U4 | length 9.4
  Top Layer w0.08: U2.L2@39.262,18.404 39.512,18.654 40.062,18.654
  Top Layer w0.09: 43.512,19.104 43.962,19.104 ; 44.412,19.104 44.762,19.104 ; 45.262,19.104 45.512,19.104 ; 45.762,17.504 45.762,17.754 45.862,17.854 45.862,18.354 45.762,18.454
  Top Layer w0.12: 40.062,18.654 40.162,18.654 40.912,19.404 43.062,19.404 43.362,19.104 43.512,19.104 ; 43.962,19.104 44.412,19.104 ; 44.762,19.104 45.262,19.104 ; 45.512,19.104 45.562,19.104 45.762,18.904 45.762,18.454 ; 45.762,17.504 45.762,17.229 U4.U4@46.162,16.829
DRAM_A_DATA13: U2.L1 U4.V4 | length 8.7
  Top Layer w0.09: 43.512,18.454 43.862,18.454 ; 45.262,16.504 45.462,16.504
  Top Layer w0.12: U2.L1@39.762,18.404 40.412,18.404 40.912,18.904 42.862,18.904 43.112,18.654 43.312,18.654 43.512,18.454 ; 43.862,18.454 44.774,18.454 45.012,18.217 45.012,16.604 45.112,16.504 45.262,16.504 ; 45.462,16.504 45.837,16.504 U4.V4@46.162,16.179
DRAM_A_DATA14: U2.G2 U4.Y4 | length 8.1
  Top Layer w0.08: U2.G2@39.262,16.404 39.512,16.654 40.062,16.654
  Top Layer w0.09: 43.512,15.204 43.862,15.204
  Top Layer w0.12: 40.062,16.654 40.412,16.654 40.662,16.404 42.112,16.404 43.312,15.204 43.512,15.204 ; 43.862,15.204 43.954,15.204 44.102,15.057 44.102,14.864 44.397,14.569 45.852,14.569 U4.Y4@46.162,14.879
DRAM_A_DATA15: U2.F1 U4.AA4 | length 7.4
  Top Layer w0.09: 45.162,13.904 45.5,13.904
  Top Layer w0.1: U2.F1@39.762,15.904 39.787,15.88 40.062,15.88
  Top Layer w0.12: 40.062,15.88 40.137,15.88 40.612,15.404 41.862,15.404 43.362,13.904 45.162,13.904 ; 45.5,13.904 45.837,13.904 U4.AA4@46.162,14.229
DRAM_A_DMI0: U2.B2 U4.Y10 | length 14.9
  Top Layer w0.3: U4.Y10@50.962,14.879 v2(51.182,14.879)
  Layer 1 w0.1: v2(39.262,13.904) v4(39.262,14.344) ; v4(50.742,14.879) v2(51.182,14.879)
  Layer 2 w0.08: 45.237,13.904 45.462,13.904 ; 46.821,14.554 47.104,14.554 ; 49.202,15.199 49.495,15.199 49.504,15.191
  Layer 2 w0.1: v4(39.262,14.344) 39.739,14.344 39.999,14.604 40.712,14.604 41.462,13.854 41.462,13.254 41.662,13.054 41.762,13.054 44.162,13.054 45.012,13.904 45.237,13.904 ; 45.462,13.904 45.812,13.904 46.012,14.104 46.362,14.104 46.812,14.554 46.821,14.554 ; 47.104,14.554 47.162,14.554 48.012,15.404 48.902,15.404 49.107,15.199 49.202,15.199 ; 49.504,15.191 50.512,15.191 50.667,15.036 50.667,15.011 50.742,14.936 v4(50.742,14.879)
DRAM_A_DMI1: U2.H2 U4.Y3 | length 7.7
  Top Layer w0.08: U2.H2@39.262,16.904 39.512,17.154 40.062,17.154
  Top Layer w0.09: 43.662,16.504 43.912,16.504
  Top Layer w0.12: 40.062,17.154 40.312,17.404 42.462,17.404 43.362,16.504 43.662,16.504 ; 43.912,16.504 43.959,16.457 43.965,16.457 44.112,16.31 44.112,16.122 44.365,15.869 44.797,15.869 44.962,15.704 44.962,15.279 U4.Y3@45.362,14.879
DRAM_A_DQS0_N: U2.D1 U4.V10 | length 15.5
  Bottom Layer w0.13: v1(39.762,14.834) 39.762,14.777 39.608,14.623 39.608,14.487 39.891,14.204 40.412,14.204 40.462,14.254 40.52,14.312 40.52,14.42 40.476,14.464 40.476,14.571 40.637,14.733 40.745,14.733 40.789,14.689 40.896,14.689 41.012,14.804 41.562,14.804 43.016,14.804 44.666,13.154 47.262,13.154 47.962,13.854 47.962,15.404 48.862,16.304 50.266,16.304 50.591,15.979 50.751,15.979 50.951,16.179 v1@50.962,16.179
  other v1: 50.962,16.129
DRAM_A_DQS0_P: U2.D2 U4.W10 | length 15.7
  Bottom Layer w0.13: v1(39.262,14.904) 39.262,14.831 39.358,14.735 39.358,14.383 39.787,13.954 40.516,13.954 41.116,14.554 42.912,14.554 43.312,14.154 44.562,12.904 47.366,12.904 48.212,13.751 48.212,15.301 48.966,16.054 50.162,16.054 50.487,15.729 50.751,15.729 50.951,15.529 v1(50.962,15.529)
DRAM_A_DQS1_N: U2.J1 U4.V3 | length 6.7
  Bottom Layer w0.13: v1(39.762,17.474) 39.762,17.401 39.666,17.305 39.666,17.079 39.866,16.879 39.954,16.879 40.062,16.879 42.532,16.879 43.107,16.304 44.629,16.304 44.954,15.979 45.151,15.979 45.351,16.179 v1(45.362,16.179)
DRAM_A_DQS1_P: U2.J2 U4.W3 | length 7
  Bottom Layer w0.13: v1(39.262,17.404) 39.262,17.347 39.416,17.193 39.416,16.976 39.762,16.629 39.954,16.629 40.062,16.629 42.429,16.629 43.004,16.054 44.525,16.054 44.85,15.729 45.151,15.729 45.351,15.529 v1(45.362,15.529)
DRAM_B_CA0: U2.W4 U4.H2 | length 22.1
  Top Layer w0.3: U4.H2@44.562,22.679 v2(44.682,22.679)
  Layer 1 w0.1: v4(38.062,22.058) v2(38.262,22.404) ; v4(44.242,22.679) v2(44.682,22.679)
  Layer 2 w0.08: 43.512,23.004 43.621,23.004 43.862,23.004
  Layer 2 w0.1: v4(38.062,22.058) 38.111,22.058 38.432,22.38 38.432,22.541 38.646,22.754 38.962,22.754 39.112,22.604 40.312,22.604 40.575,22.867 40.625,22.917 40.625,24.074 40.685,24.134 40.865,24.134 40.925,24.074 40.925,22.792 40.985,22.732 41.165,22.732 41.225,22.792 41.225,24.443 41.285,24.503 41.465,24.503 41.525,24.443 41.525,22.792 41.585,22.732 41.765,22.732 41.825,22.792 41.825,24.443 41.885,24.503 42.065,24.503 42.125,24.443 42.125,22.792 42.185,22.732 42.365,22.732 42.425,22.792 42.425,23.949 42.485,24.009 42.665,24.009 42.725,23.949 42.725,22.944 42.785,22.884 42.965,22.884 43.025,22.944 ; 43.025,22.944 43.085,23.004 43.162,23.004 43.512,23.004 ; 43.862,23.004 43.867,22.999 44.567,22.999 44.857,22.709 44.857,22.559 45.032,22.384 45.032,22.024 44.962,21.954 44.721,21.954 44.662,22.013 44.662,22.204 44.242,22.624 v4(44.242,22.679)
DRAM_B_CA1: U2.W5 U4.J2 | length 21.3
  Top Layer w0.3: U4.J2@44.562,22.029 v2(44.782,22.029)
  Layer 1 w0.1: v4(37.479,22.122) v2(37.762,22.404) ; v4(44.342,22.029) v2(44.782,22.029)
  Layer 2 w0.08: 43.621,22.354 43.912,22.354
  Layer 2 w0.1: v4(37.479,22.122) 37.479,22.637 37.42,22.696 37.42,23.663 37.562,23.804 37.562,24.204 37.312,24.454 36.762,24.454 36.662,24.354 36.662,23.838 36.432,23.608 36.432,23.234 37.112,22.554 37.112,22.004 37.104,21.996 37.104,21.913 37.262,21.754 38.212,21.754 38.512,22.054 38.912,22.054 39.062,22.204 40.062,22.204 40.342,22.204 40.402,22.144 40.462,22.084 40.642,22.084 40.702,22.144 40.702,22.468 40.762,22.528 40.942,22.528 41.002,22.468 41.002,21.728 41.062,21.668 41.242,21.668 41.302,21.728 41.302,22.472 41.362,22.532 41.542,22.532 41.602,22.472 41.602,21.728 41.662,21.668 41.842,21.668 41.902,21.728 41.902,22.472 41.962,22.532 42.142,22.532 42.202,22.472 42.202,21.728 42.262,21.668 42.442,21.668 42.502,21.728 42.502,22.487 42.562,22.547 42.742,22.547 42.802,22.487 42.802,21.728 42.862,21.668 43.042,21.668 43.102,21.728 43.102,22.144 43.162,22.204 43.212,22.204 43.362,22.204 43.512,22.354 43.621,22.354 ; 43.912,22.354 44.017,22.354 v4(44.342,22.029)
DRAM_B_CA2: U2.AE4 U4.H9 | length 17.8
  Top Layer w0.3: v2(49.842,22.679) U4.H9@50.162,22.679
  Layer 1 w0.1: v4(38.262,24.964) v2(38.262,25.404) ; v2(49.842,22.679) v4(50.282,22.679)
  Layer 2 w0.08: 45.221,23.654 45.512,23.654 ; 46.83,22.359 47.071,22.359
  Layer 2 w0.1: v4(38.262,24.964) 38.262,24.604 38.162,24.504 37.871,24.504 37.812,24.446 37.812,24.263 37.871,24.204 38.162,24.204 38.262,24.104 38.262,23.854 38.362,23.754 39.012,23.754 39.512,24.254 40.012,24.254 40.512,24.754 40.512,24.904 40.762,25.154 42.412,25.154 43.257,24.309 44.257,24.309 44.512,24.054 44.821,24.054 45.221,23.654 ; 45.512,23.654 45.608,23.654 45.762,23.5 45.762,22.654 45.962,22.454 46.562,22.454 46.662,22.354 46.825,22.354 46.83,22.359 ; 47.071,22.359 47.157,22.359 47.462,22.054 48.712,22.054 48.967,22.309 49.692,22.309 50.062,22.679 v4(50.282,22.679)
DRAM_B_CA3: U2.AF4 U4.H10 | length 18.6
  Top Layer w0.3: U4.H10@50.862,22.679 U4.H10@50.962,22.679 v2(51.182,22.679)
  Layer 1 w0.1: v4(37.822,25.904) v2(38.262,25.904) ; v4(50.742,22.679) v2(51.182,22.679)
  Layer 2 w0.08: 45.262,24.304 45.587,24.304 ; 46.762,23.004 47.112,23.004 ; 49.221,23.004 49.504,23.004
  Layer 2 w0.1: v4(37.822,25.904) v2(38.262,25.904) 38.862,25.304 38.962,25.304 39.162,25.104 39.162,24.834 39.442,24.554 39.862,24.554 40.212,24.904 40.212,25.104 40.612,25.504 42.562,25.504 43.447,24.619 44.647,24.619 44.962,24.304 45.262,24.304 ; 45.587,24.304 45.712,24.304 46.512,23.504 46.512,23.254 46.762,23.004 ; 47.112,23.004 47.612,23.004 47.662,23.004 47.722,23.064 47.722,23.414 47.782,23.474 47.962,23.474 48.022,23.414 48.022,22.473 48.082,22.413 48.262,22.413 48.322,22.473 48.322,22.944 48.382,23.004 48.662,23.004 49.221,23.004 ; 49.504,23.004 50.021,23.004 50.026,22.999 50.422,22.999 v4(50.742,22.679)
DRAM_B_CA4: U2.U5 U4.H11 | length 20.1
  Top Layer w0.3: U4.H11@51.762,22.679 v2(52.082,22.679)
  Layer 1 w0.1: v2(37.762,21.404) v4(37.866,21.018) ; v4(51.642,22.679) v2(52.082,22.679)
  Layer 2 w0.08: 43.687,21.704 43.912,21.704 ; 45.162,21.704 46.462,21.704
  Layer 2 w0.1: v4(37.866,21.018) 37.562,21.322 37.562,21.404 37.662,21.504 38.399,21.504 38.699,21.804 40.412,21.804 40.862,21.354 43.175,21.354 43.525,21.704 43.687,21.704 ; 43.912,21.704 44.421,21.704 44.426,21.709 44.699,21.709 44.704,21.704 45.162,21.704 ; 46.462,21.704 46.537,21.629 49.237,21.629 49.862,21.004 51.112,21.004 51.312,21.204 51.312,23.104 51.562,23.354 52.012,23.354 52.112,23.254 52.112,22.804 51.987,22.679 v4(51.642,22.679)
DRAM_B_CA5: U2.U6 U4.J11 | length 19.4
  Top Layer w0.3: U4.J11@51.762,22.029 v2(52.082,22.029)
  Layer 1 w0.1: v4(37.062,21.058) v2(37.262,21.404) ; v4(51.642,22.029) v2(52.082,22.029)
  Layer 2 w0.1: v4(37.062,21.058) 38.104,20.204 38.529,20.204 39.579,21.254 39.962,21.254 40.712,20.504 51.112,20.504 51.162,20.504 51.222,20.564 51.222,20.616 51.282,20.676 51.462,20.676 51.522,20.616 51.522,20.564 51.582,20.504 51.762,20.504 51.962,20.504 52.212,20.754 52.212,21.804 51.987,22.029 v4(51.642,22.029)
DRAM_B_CKE0: R50.2 U2.AA4 U4.J4 | length 16.7
  Bottom Layer w0.08: 43.512,22.354 43.912,22.354
  Bottom Layer w0.12: v1(38.262,23.404) 39.012,22.654 40.067,22.654 40.127,22.654 40.201,22.728 40.201,23.227 40.275,23.301 40.497,23.301 40.571,23.227 40.571,22.567 40.645,22.493 40.867,22.493 40.941,22.567 40.941,23.227 41.015,23.301 41.237,23.301 41.311,23.227 41.311,22.567 41.385,22.493 41.607,22.493 41.681,22.567 41.681,23.227 41.755,23.301 41.977,23.301 42.051,23.227 42.051,22.567 42.125,22.493 42.347,22.493 42.421,22.567 42.421,22.848 42.495,22.922 42.717,22.922 42.791,22.848 42.791,22.626 42.868,22.549 43.062,22.354 43.512,22.354 ; 43.912,22.354 44.262,22.354 44.312,22.404 45.462,22.404 45.762,22.704 45.762,23.804 45.862,23.904 46.412,23.904 46.562,23.754 46.562,22.429 v1(46.162,22.029)
DRAM_B_CKE1: R49.2 U2.AA5 U4.J5 | length 16.7
  Bottom Layer w0.12: v1(37.762,23.404) 38.262,22.904 38.262,22.404 38.612,22.054 40.101,22.054 40.531,22.054 40.605,21.98 40.605,21.395 40.679,21.321 40.901,21.321 40.975,21.395 40.975,22.113 41.049,22.187 41.271,22.187 41.345,22.113 41.345,21.395 41.419,21.321 41.641,21.321 41.715,21.395 41.715,22.113 41.789,22.187 42.011,22.187 42.085,22.113 42.085,21.395 42.159,21.321 42.381,21.321 42.455,21.395 42.455,21.936 42.529,22.01 42.751,22.01 42.825,21.936 42.825,21.442 42.961,21.306 43.312,20.954 47.212,20.954 47.362,21.104 47.362,21.629 47.112,21.879 47.052,21.879 46.962,21.969 R49.2@46.962,22.029
  other v1: 46.962,21.979
DRAM_B_CLK_N: R57.2 U2.V1 U4.J9 | length 19.2
  Top Layer w0.09: 49.112,22.304 49.511,22.304
  Top Layer w0.13: U2.V1@39.762,21.904 40.062,21.904 40.362,21.604 40.362,21.304 40.362,21.254 40.588,21.029 40.662,20.954 40.983,20.954 ; 40.823,20.954 40.983,20.954 ; 49.112,22.299 48.871,22.299 48.712,22.458 48.712,25.554 48.312,25.954 47.809,25.954 47.635,25.781 47.412,25.558 47.412,21.204 47.162,20.954 44.073,20.954 42.125,20.954 40.983,20.954 ; 49.511,22.299 49.53,22.299 49.85,21.979 v1(50.162,21.979)
DRAM_B_CLK_P: R57.1 U2.V2 U4.J8 | length 19.5
  Top Layer w0.08: U2.V2@39.262,21.904 39.507,21.659 39.954,21.659
  Top Layer w0.13: 39.954,21.659 40.112,21.501 40.112,21.151 40.512,20.751 40.559,20.704 40.957,20.704 41.033,20.628 41.033,20.546 41.109,20.47 41.337,20.47 41.413,20.546 41.413,20.628 41.49,20.704 42.107,20.704 47.266,20.704 47.662,21.101 47.662,25.454 47.912,25.704 48.209,25.704 48.462,25.451 48.462,23.154 48.362,23.054 48.238,23.054 48.162,22.978 48.162,22.831 48.238,22.754 48.362,22.754 48.462,22.654 48.462,22.354 48.762,22.054 49.287,22.054 v1(49.362,21.979)
DRAM_B_CS0: U2.U4 U4.H4 | length 17.1
  Top Layer w0.12: U4.H4@46.162,22.679 46.562,22.279 v2(46.562,21.654)
  Layer 1 w0.1: v2(38.262,21.404) v4(38.702,21.404) ; v2(46.562,21.654) v4(46.873,21.343)
  Layer 2 w0.1: v4(38.702,21.404) 38.742,21.445 38.856,21.445 38.866,21.454 40.262,21.454 40.687,21.029 41.412,21.029 41.762,21.029 41.822,20.969 41.822,20.861 41.882,20.801 42.062,20.801 42.122,20.861 42.122,20.984 42.182,21.044 42.362,21.044 42.422,20.984 42.422,20.861 42.482,20.801 42.662,20.801 42.722,20.861 42.722,20.984 42.782,21.044 42.962,21.044 43.022,20.984 43.022,20.861 43.082,20.801 43.262,20.801 43.322,20.861 43.322,20.969 43.382,21.029 43.562,21.029 43.622,20.969 43.622,20.861 43.682,20.801 43.862,20.801 43.922,20.861 43.922,20.984 43.982,21.044 44.162,21.044 44.222,20.984 44.222,20.861 44.282,20.801 44.462,20.801 44.522,20.861 44.522,20.969 44.582,21.029 44.762,21.029 44.822,20.969 44.822,20.861 44.882,20.801 45.062,20.801 45.122,20.861 45.122,20.969 45.182,21.029 45.562,21.029 46.587,21.029 46.712,20.904 48.962,20.904 49.062,21.004 49.062,21.154 48.962,21.254 47.262,21.254 47.162,21.354 46.884,21.354 v4(46.873,21.343)
DRAM_B_CS1: U2.AA6 U4.H3 | length 11.6
  Top Layer w0.12: U2.AA6@37.262,23.404 37.262,23.154 37.489,22.928 37.739,22.928 v1(37.762,22.904)
  Top Layer w0.3: U4.H3@45.362,22.679 v2(45.582,22.679)
  Layer 1 w0.1: v4(45.142,22.679) v2(45.582,22.679)
  Layer 2 w0.08: 43.612,23.654 43.912,23.654
  Layer 2 w0.1: v1(37.762,22.904) 38.259,22.904 38.409,23.054 39.212,23.054 39.312,22.954 40.062,22.954 40.262,23.154 40.262,24.054 41.012,24.804 42.212,24.804 43.362,23.654 43.612,23.654 ; 43.912,23.654 43.917,23.659 44.839,23.659 45.032,23.466 45.032,22.843 45.142,22.733 v4(45.142,22.679)
DRAM_B_DATA0: U2.AC1 U4.B2 | length 5.7
  Top Layer w0.1: U2.AC1@39.762,24.404 39.787,24.429 40.062,24.429
  Top Layer w0.12: 40.062,24.429 40.137,24.429 40.612,24.904 41.962,24.904 43.327,26.269 44.027,26.269 44.336,26.579 U4.B2@44.562,26.579
DRAM_B_DATA1: U2.AB1 U4.C2 | length 5.9
  Top Layer w0.09: 43.562,24.954 43.862,24.954
  Top Layer w0.12: U2.AB1@39.762,23.904 42.212,23.904 43.262,24.954 43.562,24.954 ; 43.862,24.954 43.962,24.954 44.162,25.154 44.162,25.529 U4.C2@44.562,25.929
DRAM_B_DATA2: U2.Y1 U4.E2 | length 5.7
  Top Layer w0.09: 43.606,23.654 43.912,23.654 44.112,23.854 44.112,24.179 44.237,24.304
  Top Layer w0.12: U2.Y1@39.762,22.904 42.662,22.904 43.412,23.654 43.606,23.654 ; 44.237,24.304 U4.E2@44.562,24.629
DRAM_B_DATA3: U2.Y2 U4.F2 | length 6.4
  Top Layer w0.08: U2.Y2@39.262,22.904 39.512,22.654 40.062,22.654
  Top Layer w0.09: 43.512,23.004 43.918,23.004
  Top Layer w0.12: 40.062,22.654 40.712,22.654 40.962,22.404 42.812,22.404 43.412,23.004 43.512,23.004 ; 43.918,23.004 44.162,23.249 44.162,23.579 U4.F2@44.562,23.979
DRAM_B_DATA4: U2.W2 U4.F4 | length 9.4
  Top Layer w0.08: U2.W2@39.262,22.404 39.512,22.154 40.062,22.154
  Top Layer w0.09: 43.512,21.704 43.962,21.704 ; 44.412,21.704 44.762,21.704 ; 45.262,21.704 45.512,21.704 ; 45.762,22.354 45.862,22.454 45.862,22.954 45.762,23.054 45.762,23.304
  Top Layer w0.12: 40.062,22.154 40.162,22.154 40.912,21.404 43.062,21.404 43.362,21.704 43.512,21.704 ; 43.962,21.704 44.412,21.704 ; 44.762,21.704 45.262,21.704 ; 45.512,21.704 45.562,21.704 45.762,21.904 45.762,22.354 ; 45.762,23.304 45.762,23.579 U4.F4@46.162,23.979
DRAM_B_DATA5: U2.W1 U4.E4 | length 8.7
  Top Layer w0.09: 43.512,22.354 43.862,22.354 ; 45.262,24.304 45.462,24.304
  Top Layer w0.12: U2.W1@39.762,22.404 40.062,22.404 40.412,22.404 40.912,21.904 42.862,21.904 43.112,22.154 43.312,22.154 43.512,22.354 ; 43.862,22.354 44.812,22.354 45.012,22.554 45.012,24.204 45.112,24.304 45.262,24.304 ; 45.462,24.304 45.837,24.304 U4.E4@46.162,24.629
DRAM_B_DATA6: U2.AC2 U4.C4 | length 8.1
  Top Layer w0.08: U2.AC2@39.262,24.404 39.512,24.154 40.062,24.154
  Top Layer w0.09: 43.512,25.604 43.862,25.604
  Top Layer w0.12: 40.062,24.154 40.412,24.154 40.662,24.404 42.112,24.404 43.312,25.604 43.512,25.604 ; 43.862,25.604 43.954,25.604 44.102,25.752 44.102,25.944 44.397,26.239 45.852,26.239 U4.C4@46.162,25.929
DRAM_B_DATA7: U2.AD1 U4.B4 | length 7.4
  Top Layer w0.09: 45.162,26.904 45.5,26.904
  Top Layer w0.1: U2.AD1@39.762,24.904 39.787,24.929 40.062,24.929
  Top Layer w0.12: 40.062,24.929 40.137,24.929 40.612,25.404 41.862,25.404 43.362,26.904 45.162,26.904 ; 45.5,26.904 45.837,26.904 U4.B4@46.162,26.579
DRAM_B_DATA8: U2.AH3 U4.B11 | length 16.6
  Top Layer w0.3: U4.B11@51.762,26.579 v2(52.082,26.579)
  Layer 1 w0.1: v4(38.762,26.464) v2@38.762,26.904 ; v4(51.642,26.579) v2(52.082,26.579)
  Layer 2 w0.1: v4(38.762,26.464) 38.762,26.754 38.887,26.879 39.137,26.879 39.432,27.174 39.432,27.574 40.662,28.804 45.012,28.804 45.462,28.354 47.612,28.354 48.312,27.654 51.032,27.654 51.232,27.454 51.292,27.394 51.292,26.929 v4(51.642,26.579)
  other v2: 38.762,26.874
DRAM_B_DATA9: U2.AJ2 U4.C11 | length 17.5
  Top Layer w0.3: U4.C11@51.762,25.929 v2(52.082,25.929)
  Layer 1 w0.1: v2@39.268,27.419 v4(39.268,27.859) ; v4(51.642,25.929) v2(52.082,25.929)
  Layer 2 w0.1: v4@39.262,27.844 39.287,27.869 39.287,28.051 40.39,29.154 45.362,29.154 45.812,28.704 47.862,28.704 48.612,27.954 51.562,27.954 52.412,27.104 52.412,26.404 52.262,26.254 51.967,26.254 v4(51.642,25.929)
  other v2: 39.282,27.404
DRAM_B_DATA10: U2.AE1 U4.E11 | length 14.4
  Top Layer w0.12: U2.AE1@39.762,25.404 40.162,25.404 40.662,25.904 41.812,25.904 v1(42.562,26.654)
  Top Layer w0.3: U4.E11@51.762,24.629 v2(52.082,24.629)
  Layer 1 w0.1: v4(51.642,24.629) v2(52.082,24.629)
  Layer 2 w0.08: 46.821,24.954 47.212,24.954 ; 50.876,24.309 51.322,24.309 v4(51.642,24.629)
  Layer 2 w0.1: v1(42.562,26.654) 44.062,26.654 44.812,25.904 46.004,25.904 46.632,25.276 46.632,25.143 46.821,24.954 ; 47.212,24.954 47.662,24.504 48.762,24.504 48.837,24.579 49.689,24.579 49.959,24.309 50.876,24.309
DRAM_B_DATA11: U2.AD2 U4.F11 | length 14.7
  Top Layer w0.3: U4.F11@51.762,23.979 v2(52.082,23.979)
  Layer 1 w0.1: v2(39.262,24.904) v4(39.702,24.904) ; v4(51.642,23.979) v2(52.082,23.979)
  Layer 2 w0.08: 45.212,24.954 45.512,24.954 ; 46.812,23.654 47.037,23.654 ; 49.221,23.654 49.512,23.654 ; 50.821,23.654 51.1,23.654
  Layer 2 w0.1: v4(39.702,24.904) 39.702,25.194 40.312,25.804 42.716,25.804 43.571,24.949 45.207,24.949 45.212,24.954 ; 45.512,24.954 46.812,23.654 ; 47.037,23.654 49.221,23.654 ; 49.512,23.654 50.021,23.654 50.026,23.659 50.299,23.659 50.304,23.654 50.821,23.654 ; 51.1,23.654 51.317,23.654 v4(51.642,23.979)
DRAM_B_DATA12: U2.AE2 U4.F9 | length 13.6
  Top Layer w0.08: U2.AE2@39.262,25.404 39.512,25.654 39.941,25.654 40.062,25.775
  Top Layer w0.12: 40.062,25.775 40.591,26.304 41.462,26.304 v1(41.812,26.654)
  Top Layer w0.3: U4.F9@50.162,23.979 v2(50.482,23.979)
  Layer 1 w0.1: v4(50.042,23.979) v2(50.482,23.979)
  Layer 2 w0.08: 43.682,25.604 43.912,25.604 ; 46.873,24.304 47.062,24.304
  Layer 2 w0.1: v1(41.812,26.654) 42.312,26.154 43.212,26.154 43.412,25.954 43.412,25.785 43.597,25.599 43.682,25.599 ; 43.912,25.604 44.421,25.604 44.426,25.609 45.499,25.609 45.832,25.276 45.832,25.143 46.671,24.304 46.873,24.304 ; 47.062,24.304 47.212,24.304 47.462,24.054 48.912,24.054 49.167,24.309 49.607,24.309 49.897,24.02 50.002,24.02 v4(50.042,23.979)
DRAM_B_DATA13: U2.AG1 U4.E9 | length 12.7
  Top Layer w0.12: U2.AG1@39.762,26.404 40.212,26.404 40.462,26.654 41.012,26.654 41.762,27.404 v1(41.812,27.404)
  Top Layer w0.3: U4.E9@50.162,24.629 v2(50.482,24.629)
  Layer 1 w0.1: v4(50.042,24.629) v2(50.482,24.629)
  Layer 2 w0.08: 46.816,25.609 47.104,25.609
  Layer 2 w0.1: v1(41.812,27.404) 42.212,27.004 43.512,27.004 44.262,27.004 45.062,26.204 45.512,26.204 45.612,26.304 46.121,26.304 46.816,25.609 ; 47.104,25.604 47.108,25.609 47.208,25.609 47.876,24.941 49.731,24.941 v4(50.042,24.629)
DRAM_B_DATA14: U2.AG2 U4.C9 | length 13.9
  Top Layer w0.08: U2.AG2@39.262,26.404 39.512,26.654 39.862,26.654
  Top Layer w0.12: 39.862,26.654 40.012,26.654 40.062,26.704 40.462,27.104 v1(40.462,27.404)
  Top Layer w0.3: v2(49.842,25.929) U4.C9@50.162,25.929
  Layer 1 w0.1: v2(49.842,25.929) v4(50.282,25.929)
  Layer 2 w0.08: 49.276,26.259 49.495,26.259 49.498,26.263 49.949,26.263 v4(50.282,25.929)
  Layer 2 w0.1: v1(40.462,27.404) 41.162,28.104 44.362,28.104 44.862,27.604 47.162,27.604 47.337,27.429 47.337,26.779 47.857,26.259 49.276,26.259
DRAM_B_DATA15: U2.AH1 U4.B9 | length 13.6
  Top Layer w0.08: v2(39.748,26.929) 39.762,26.916 U2.AH1@39.762,26.904
  Top Layer w0.3: U4.B9@50.162,26.579 v2(50.482,26.579)
  Layer 1 w0.1: v2(39.748,26.929) v4(40.059,26.618) ; v4(50.042,26.579) v2(50.482,26.579)
  Layer 2 w0.08: 49.087,26.904 49.717,26.904 v4(50.042,26.579)
  Layer 2 w0.1: v4(40.059,26.618) 40.1,26.659 40.1,26.769 40.112,26.782 40.112,27.654 40.912,28.454 44.662,28.454 45.112,28.004 47.362,28.004 47.712,27.654 47.712,27.154 47.962,26.904 49.087,26.904
DRAM_B_DMI0: U2.AB2 U4.C3 | length 7.7
  Top Layer w0.08: U2.AB2@39.262,23.904 39.512,23.654 40.062,23.654
  Top Layer w0.09: 43.662,24.304 43.912,24.304
  Top Layer w0.12: 40.062,23.654 40.312,23.404 42.462,23.404 43.362,24.304 43.662,24.304 ; 43.912,24.304 43.959,24.352 43.965,24.352 44.112,24.499 44.112,24.687 44.365,24.939 44.797,24.939 44.962,25.104 44.962,25.529 U4.C3@45.362,25.929
DRAM_B_DMI1: U2.AH2 U4.C10 | length 15
  Top Layer w0.3: U4.C10@50.862,25.929 U4.C10@50.962,25.929 v2(51.182,25.929)
  Layer 1 w0.1: v4(39.262,26.464) v2(39.262,26.904) ; v4(50.742,25.929) v2(51.182,25.929)
  Layer 2 w0.08: 45.237,26.904 45.462,26.904 ; 46.821,26.254 47.104,26.254 ; 49.202,25.609 49.495,25.609 49.504,25.618
  Layer 2 w0.1: v4(39.262,26.464) 39.739,26.464 39.999,26.204 40.712,26.204 41.462,26.954 41.462,27.554 41.662,27.754 41.762,27.754 44.162,27.754 44.462,27.454 45.012,26.904 45.237,26.904 ; 45.462,26.904 45.812,26.904 46.012,26.704 46.362,26.704 46.812,26.254 46.821,26.254 ; 47.104,26.254 47.162,26.254 48.012,25.404 48.902,25.404 49.107,25.609 49.202,25.609 ; 49.504,25.618 50.512,25.618 50.667,25.773 50.667,25.798 50.742,25.873 v4(50.742,25.929)
DRAM_B_DQS0_N: U2.AA1 U4.E3 | length 6.7
  Bottom Layer w0.13: v1(39.762,23.334) 39.762,23.408 39.666,23.504 39.666,23.729 39.866,23.929 39.954,23.929 40.062,23.929 42.532,23.929 43.107,24.504 44.629,24.504 44.954,24.829 45.151,24.829 45.351,24.629 v1(45.362,24.629)
DRAM_B_DQS0_P: U2.AA2 U4.D3 | length 7
  Bottom Layer w0.13: v1(39.262,23.404) 39.262,23.462 39.416,23.616 39.416,23.833 39.762,24.179 39.954,24.179 40.062,24.179 42.429,24.179 43.004,24.754 44.525,24.754 44.85,25.079 45.151,25.079 45.351,25.279 v1(45.362,25.279)
DRAM_B_DQS1_N: U2.AF1 U4.E10 | length 15.5
  Bottom Layer w0.13: v1(39.762,25.974) 39.762,26.032 39.608,26.186 39.608,26.322 39.891,26.604 40.076,26.604 40.412,26.604 40.505,26.511 40.505,26.404 40.476,26.375 40.476,26.267 40.637,26.106 40.745,26.106 40.774,26.135 40.882,26.135 40.966,26.05 41.012,26.004 43.016,26.004 44.666,27.654 47.262,27.654 47.962,26.954 47.962,25.404 48.862,24.504 50.266,24.504 50.591,24.829 50.751,24.829 50.951,24.629 v1@50.962,24.629
  other v1: 50.962,24.679